# Altium PCB PCB2_SENSOR.PcbDoc
Units mm, origin at the board's own origin, x right, y up, seen from the top; angles counter-clockwise.
Board outline 152.4 x 101.6 mm, 2 copper layers (Top Layer, Bottom Layer); 16 components, 12 nets, 50 pads, 6 vias.
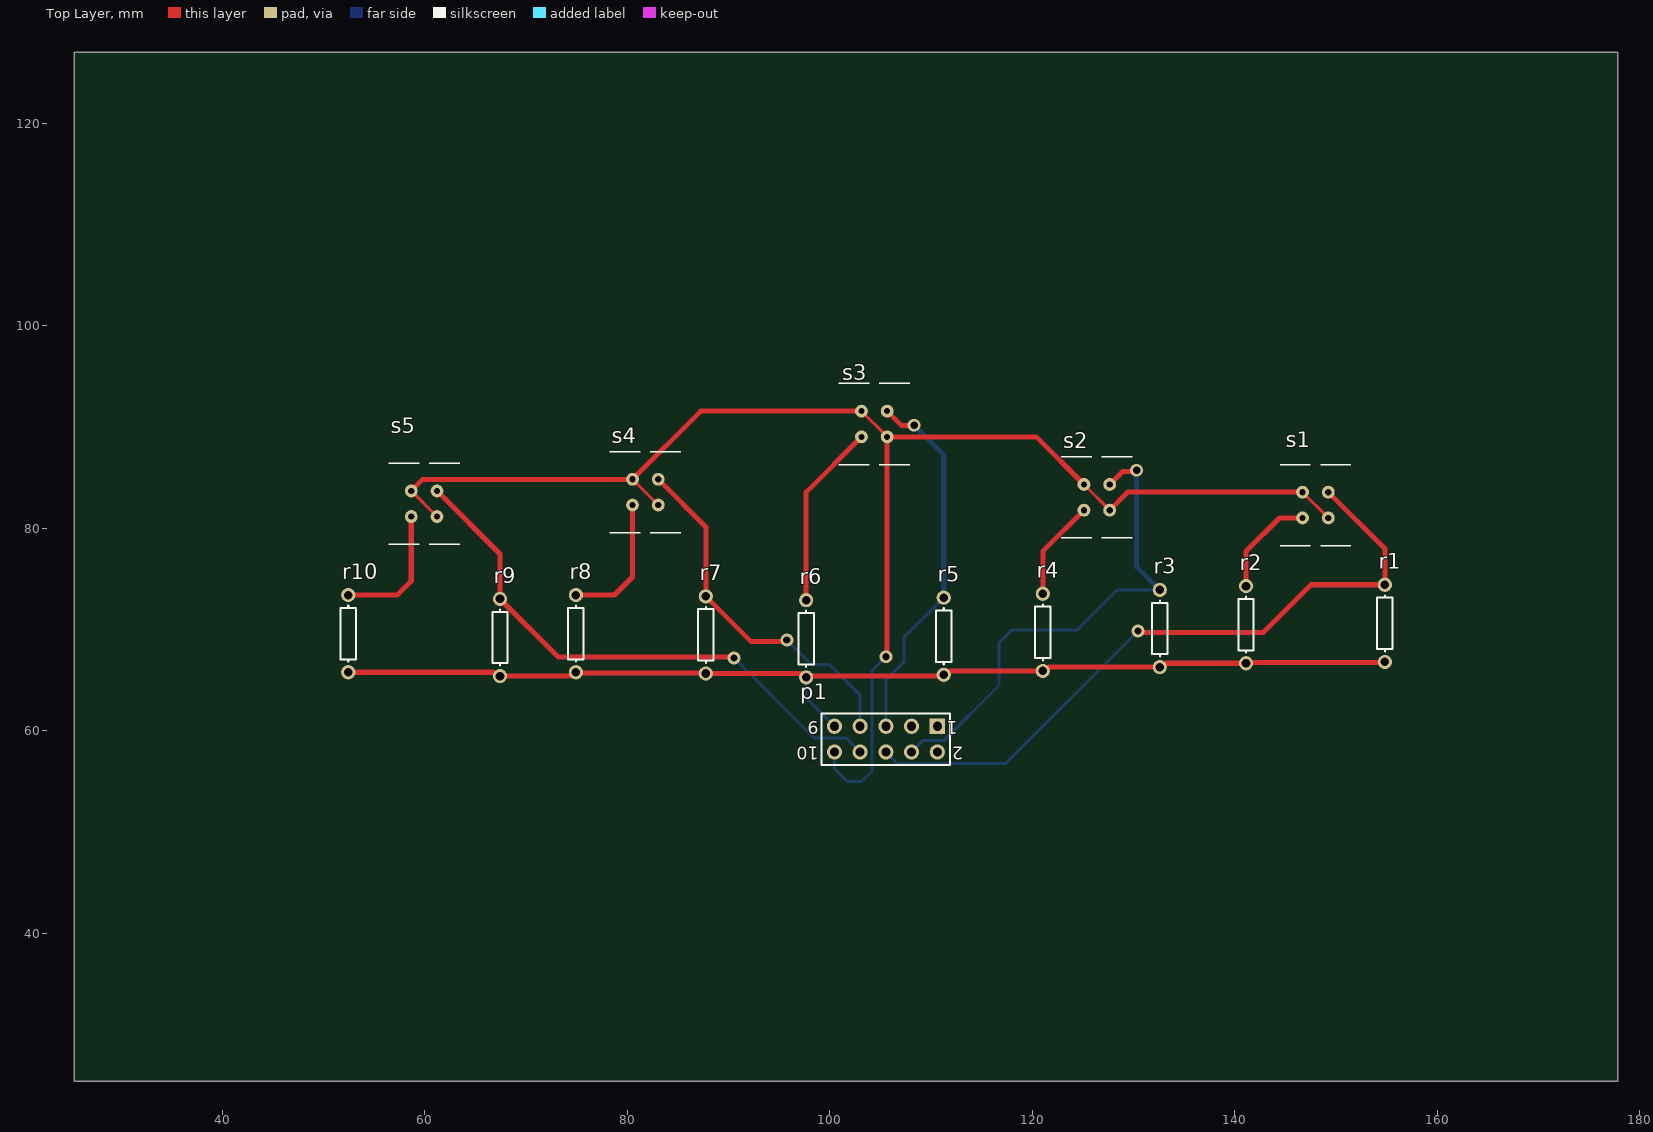
[diagram p0: Top Layer view]
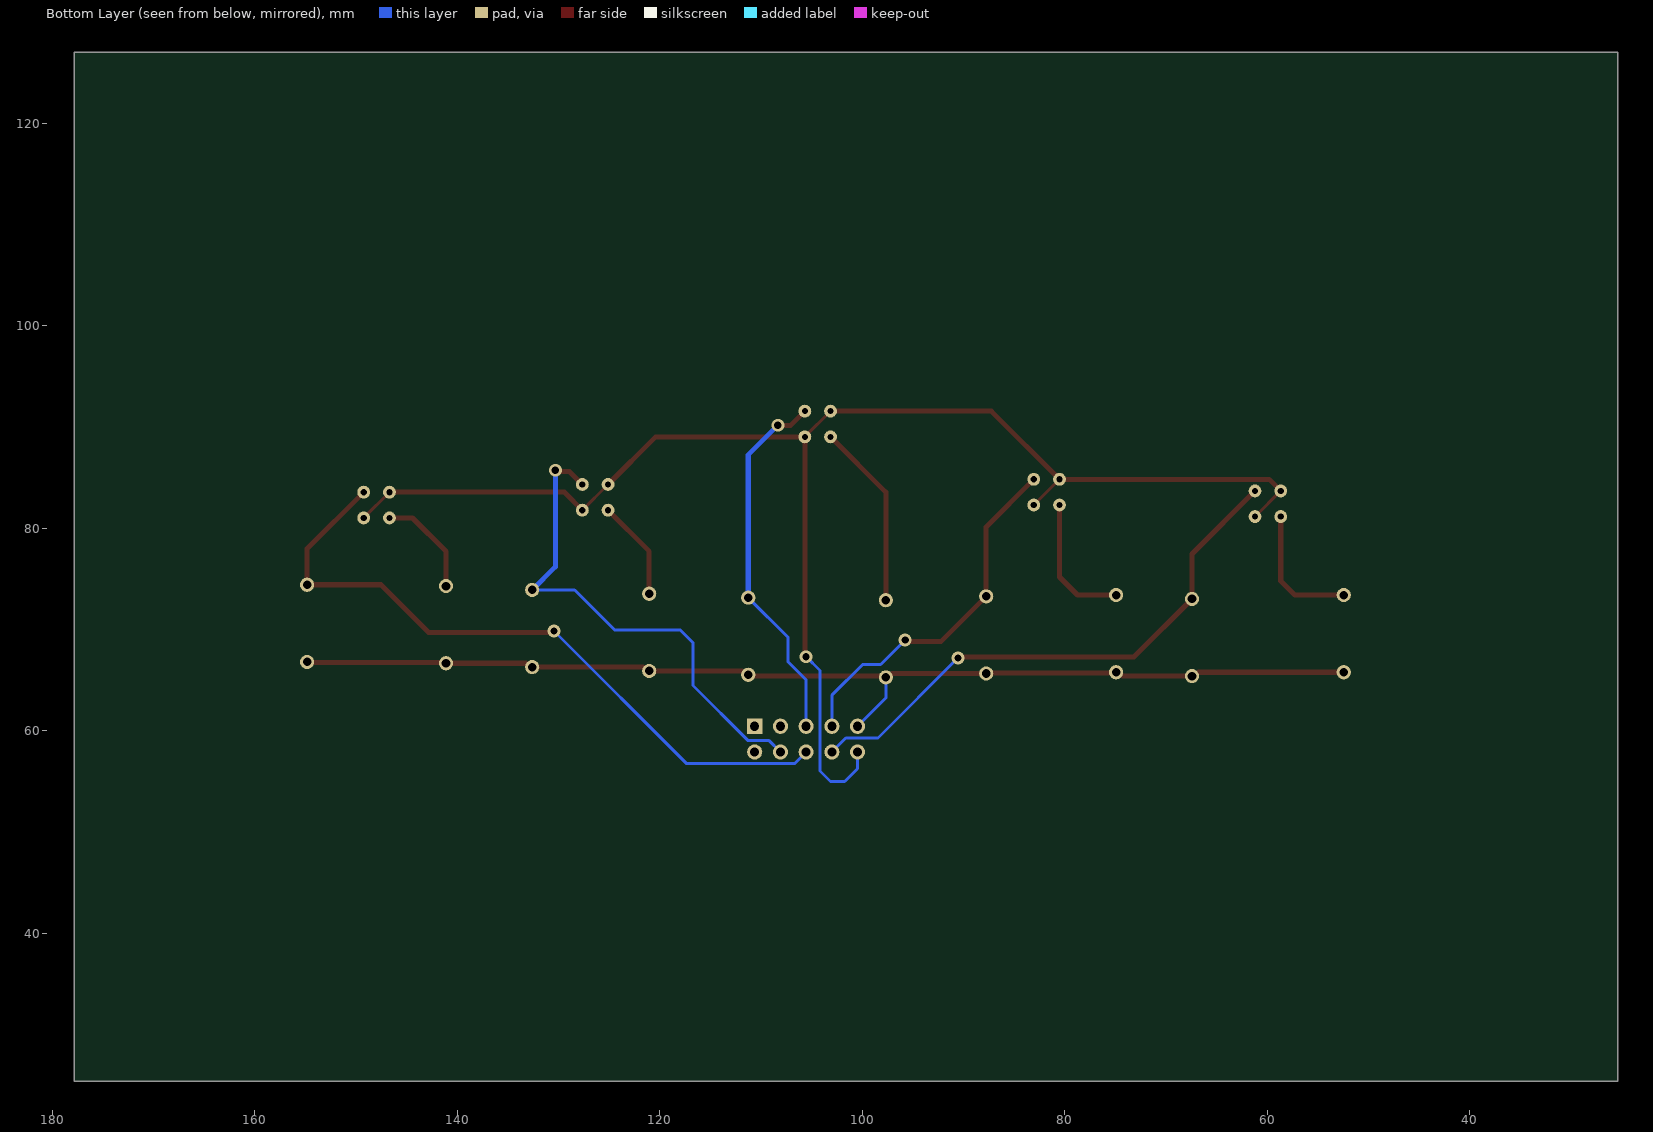
[diagram p1: Bottom Layer view, seen from below]

## Layer stack, top to bottom
Top Solder: solder mask 0.0102, Solder Resist, Dk 3.5
Top Layer: signal copper 0.0356
Dielectric 1: dielectric 0.32, FR-4, Dk 4.8
Bottom Layer: signal copper 0.0356
Bottom Solder: solder mask 0.0102, Solder Resist, Dk 3.5

## Board outline
25.4,25.4 177.8,25.4 177.8,127 25.4,127

## Design rules (kind name [scope] priority, off if disabled: settings)
Clearance [All] p1: gap=0.254 ignorepadtopadclearanceinfootprint=FALSE except(0: Arc-Hole Track-Hole SMDPad-Hole THPad-Hole Via-Hole Fill-Hole Poly-Hole Region-Hole Text-Hole; 0.4: Arc-Arc Arc-Track Track-Track)
PolygonConnect [All] p1: connectstyle=Relief reliefconductorwidth=0.254 reliefentries=4 polygonreliefangle="90 Angle" airgapwidth=0.254
RoutingVias [All] p1: holewidth=0.711 width=1.27 viastyle="Through Hole" minholewidth=0.711 minwidth=1.27 maxholewidth=0.711 maxwidth=1.27
SolderMaskExpansion [All] p1: expansion=0.102
Width [All] p1: maxlimit=0.7 minlimit=0.3 preferedwidth=0.5
30 further rules are at their usual default settings.

## Classes and differential pairs
component class Sheet1: r3 r4 r6 r7 r8 r9 r10 s2 s3 s4 s5

## Components (designator, comment, footprint, x,y, rotation, side; value= is the part's Value field where it differs from the comment)
p1 "Header 5X2" HDR2X5 110.617,60.452 r180 top
r1 "Res1" AXIAL-0.3 154.813,70.612 r90 top value=100k
r2 "Res1" AXIAL-0.3 141.097,70.485 r90 top value=470
r3 "Res1" AXIAL-0.3 132.588,70.104 r90 top value=100k
r4 "Res1" AXIAL-0.3 121.031,69.723 r90 top value=470
r5 "Res1" AXIAL-0.3 111.252,69.342 r90 top value=100k
r6 "Res1" AXIAL-0.3 97.663,69.088 r90 top value=470
r7 "Res1" AXIAL-0.3 87.757,69.469 r90 top value=100k
r8 "Res1" AXIAL-0.3 74.93,69.596 r90 top value=470
r9 "Res1" AXIAL-0.3 67.437,69.215 r90 top value=100k
r10 "Res1" AXIAL-0.3 52.451,69.596 r90 top value=470
s1 "CNY70" *4_CNY70(Primary) 147.955,82.296 r0 top
s2 "CNY70" *4_CNY70(Primary) 126.365,83.058 r0 top
s3 "CNY70" *4_CNY70(Primary) 104.394,90.297 r0 top
s4 "CNY70" *4_CNY70(Primary) 81.788,83.566 r0 top
s5 "CNY70" *4_CNY70(Primary) 59.944,82.423 r0 top

## Footprints (in the part's own frame and the unit in brackets; to place one, negate y for a bottom-side part, rotate by r counter-clockwise, add the part's x,y. Pads: shape width x height; smd on the part's side, far side on the other; paste and mask are expansions set on the pad)
*4_CNY70(Primary) [mil]
  round 50 hole 24: A(-50,50) C(50,-50) E(50,50) K(-50,-50)
  silkscreen extent -138,-157 138,157
AXIAL-0.3 [mm] "Axial Device, Thru-Hole; 2 Leads; 0.3 in Pin Spacing"
  round 1.4 hole 0.85: 1(-3.81,0) 2(3.81,0)
  silkscreen extent -2.77,-0.76 2.77,0.76
HDR2X5 [mm] "Connector; Header; 5x2 Position"
  rect 1.5x1.5 hole 0.9: 1(0,0)
  round 1.5 hole 0.9: 2(0,2.54) 3(2.54,0) 4(2.54,2.54) 5(5.08,0) 6(5.08,2.54) 7(7.62,0) 8(7.62,2.54) 9(10.16,0) 10(10.16,2.54)
  silkscreen extent -1.27,-1.27 11.43,3.81

## Part data
p1: "Header, 5-Pin, Dual row", LatestRevisionDate=17-Jul-2002, LatestRevisionNote="Re-released for DXP Platform.", Publisher="Altium Limited"
r1 r2 r3 r4 r5 r6 r7 r8 r9 r10: "Resistor", LatestRevisionDate=17-Jul-2002, LatestRevisionNote="Re-released for DXP Platform.", PackageDescription="Axial Device, Thru-Hole; 2 Leads; 0.3 in Pin Spacing", PackageReference=AXIAL-0.3, Published=8-Jun-2000, Publisher="Altium Limited"
s1 s2 s3 s4 s5: "CNY70 Series 1 mA 1.25 V 950 nm 200 mW Reflective Optical Sensor 4 Pin", Package="PCB Mount Vishay", Availability=Unavailable, MF=Vishay, MP=CNY70, Price=None, SnapEDA_Link=https://www.snapeda.com/parts/CNY70/Vishay%20Semiconductor%20Opto%20Division/view-part/?ref=snap

## Via types
v1: diameter 1.27, hole 0.711, Top Layer to Bottom Layer, 6 vias

## Nets (pads, with @x,y where several pads share a name; then routed paths per layer and width w, separated by ;. In a path a pad name is that pad's centre, name@x,y a point inside that pad or via, vN(x,y) a via of type N, cw(c..) or ccw(c..) an arc to the next point about the centre after c; other vN are vias at no path point)
GND: p1.9 r1.1 r2.1 r3.1 r4.1 r5.1 r6.1 r7.1 r8.1 r9.1 r10.1 | length 109.5
  Top Layer w0.5: r10.1 66.812,65.786 67.193,65.405 r9.1 74.305,65.405 74.686,65.786 r8.1 74.993,65.722 87.694,65.722 r7.1 97.038,65.659 97.419,65.278 r6.1 97.79,65.405 111.125,65.405 r5.1 111.496,65.532 111.877,65.913 r4.1 121.275,65.913 121.656,66.294 r3.1 132.832,66.294 133.213,66.675 r2.1 141.16,66.739 154.749,66.739 r1.1
  Bottom Layer w0.3: r6.1 97.663,63.246 p1.9
Netp1_4: p1.4 r3.2 s2.E | length 49.6
  Top Layer w0.5: s2.E 128.917,85.61 130.187,85.61 v1(130.302,85.725)
  Bottom Layer w0.3: p1.4 109.231,59.066 111.302,59.066 116.713,64.477 116.713,68.707 117.983,69.977 124.46,69.977 128.397,73.914 r3.2
  Bottom Layer w0.5: v1(130.302,85.725) 130.302,76.2 r3.2
Netp1_5: p1.5 r5.2 s3.E | length 36.5
  Top Layer w0.5: s3.E 107.061,90.17 v1(108.331,90.17)
  Bottom Layer w0.3: p1.5 105.537,65.024 107.315,66.802 107.315,69.215 r5.2
  Bottom Layer w0.5: v1(108.331,90.17) 111.252,87.249 r5.2
Netp1_6: p1.6 r1.2 s1.E | length 68.6
  Top Layer w0.5: v1(130.429,69.85) 130.556,69.723 142.817,69.723 147.516,74.422 r1.2 154.813,77.978 s1.E
  Bottom Layer w0.3: p1.6 106.691,56.758 117.337,56.758 v1(130.429,69.85)
Netp1_7: p1.7 r7.2 s4.E | length 35.9
  Top Layer w0.5: s4.E 87.757,80.137 r7.2 92.202,68.834 95.631,68.834 v1(95.758,68.961)
  Bottom Layer w0.3: v1(95.758,68.961) 98.171,66.548 99.949,66.548 102.997,63.5 p1.7
Netp1_8: p1.8 r9.2 s5.E | length 55.1
  Top Layer w0.5: s5.E 67.437,77.47 r9.2 73.152,67.31 90.424,67.31 v1(90.551,67.183)
  Bottom Layer w0.3: v1(90.551,67.183) 98.436,59.298 101.611,59.298 p1.8
Netr2_2: r2.2 s1.K | length 10.4
  Top Layer w0.5: r2.2 141.097,77.724 144.399,81.026 s1.K
Netr4_2: r4.2 s2.K | length 9.9
  Top Layer w0.5: r4.2 121.031,77.724 s2.K
Netr6_2: r6.2 s3.K | length 18.4
  Top Layer w0.5: r6.2 97.663,83.566 s3.K
Netr8_2: r8.2 s4.K | length 13.4
  Top Layer w0.5: r8.2 78.74,73.406 80.518,75.184 s4.K
Netr10_2: r10.2 s5.K | length 13.2
  Top Layer w0.5: r10.2 57.277,73.406 58.674,74.803 s5.K
VCC: p1.10 s1.A s1.C s2.A s2.C s3.A s3.C s4.A s4.C s5.A s5.C | length 146.9
  Top Layer w0.3: s5.A s5.C ; s4.A s4.C ; s3.A s3.C ; s2.A s2.C ; s1.A s1.C
  Top Layer w0.5: s5.A 59.817,84.836 s4.A 87.249,91.567 s3.A ; v1(105.537,67.31) 105.664,67.437 s3.C 120.396,89.027 s2.A ; s2.C 129.275,83.428 129.278,83.428 129.416,83.566 s1.A
  Bottom Layer w0.3: p1.10 100.457,56.261 101.727,54.991 103.124,54.991 104.174,56.041 104.174,65.947 v1(105.537,67.31)
  Bottom Layer w0.5: v1(105.537,67.31) v1@105.648,67.199
pads on no net: p1.1 p1.2 p1.3

## Silkscreen, mask and mechanical layers (free items; w line width, h text height)
Mechanical 1:
  lines w1.2: 49.784,51.816 49.784,97.028 157.607,97.028 157.607,51.816 49.784,51.816

## Text inside footprints (layer, text, board x,y; h text height)
p1: Top Overlay "2" at 113.157,58.42 h1.27 r180; Top Overlay "1" at 112.649,60.96 h1.27 r180; Top Overlay "9" at 98.933,60.96 h1.27 r180; Top Overlay "10" at 98.933,58.42 h1.27 r180